# Altium PCB PCB_2_copi.PcbDoc
Units mil, origin at the board's own origin, x right, y up, seen from the top; angles counter-clockwise.
Board outline 6560 x 3345 mil, 2 copper layers (Top Layer, Bottom Layer); 164 components, 87 nets, 548 pads, 8 vias.
Unrouted connection lines stored in the file: 2.
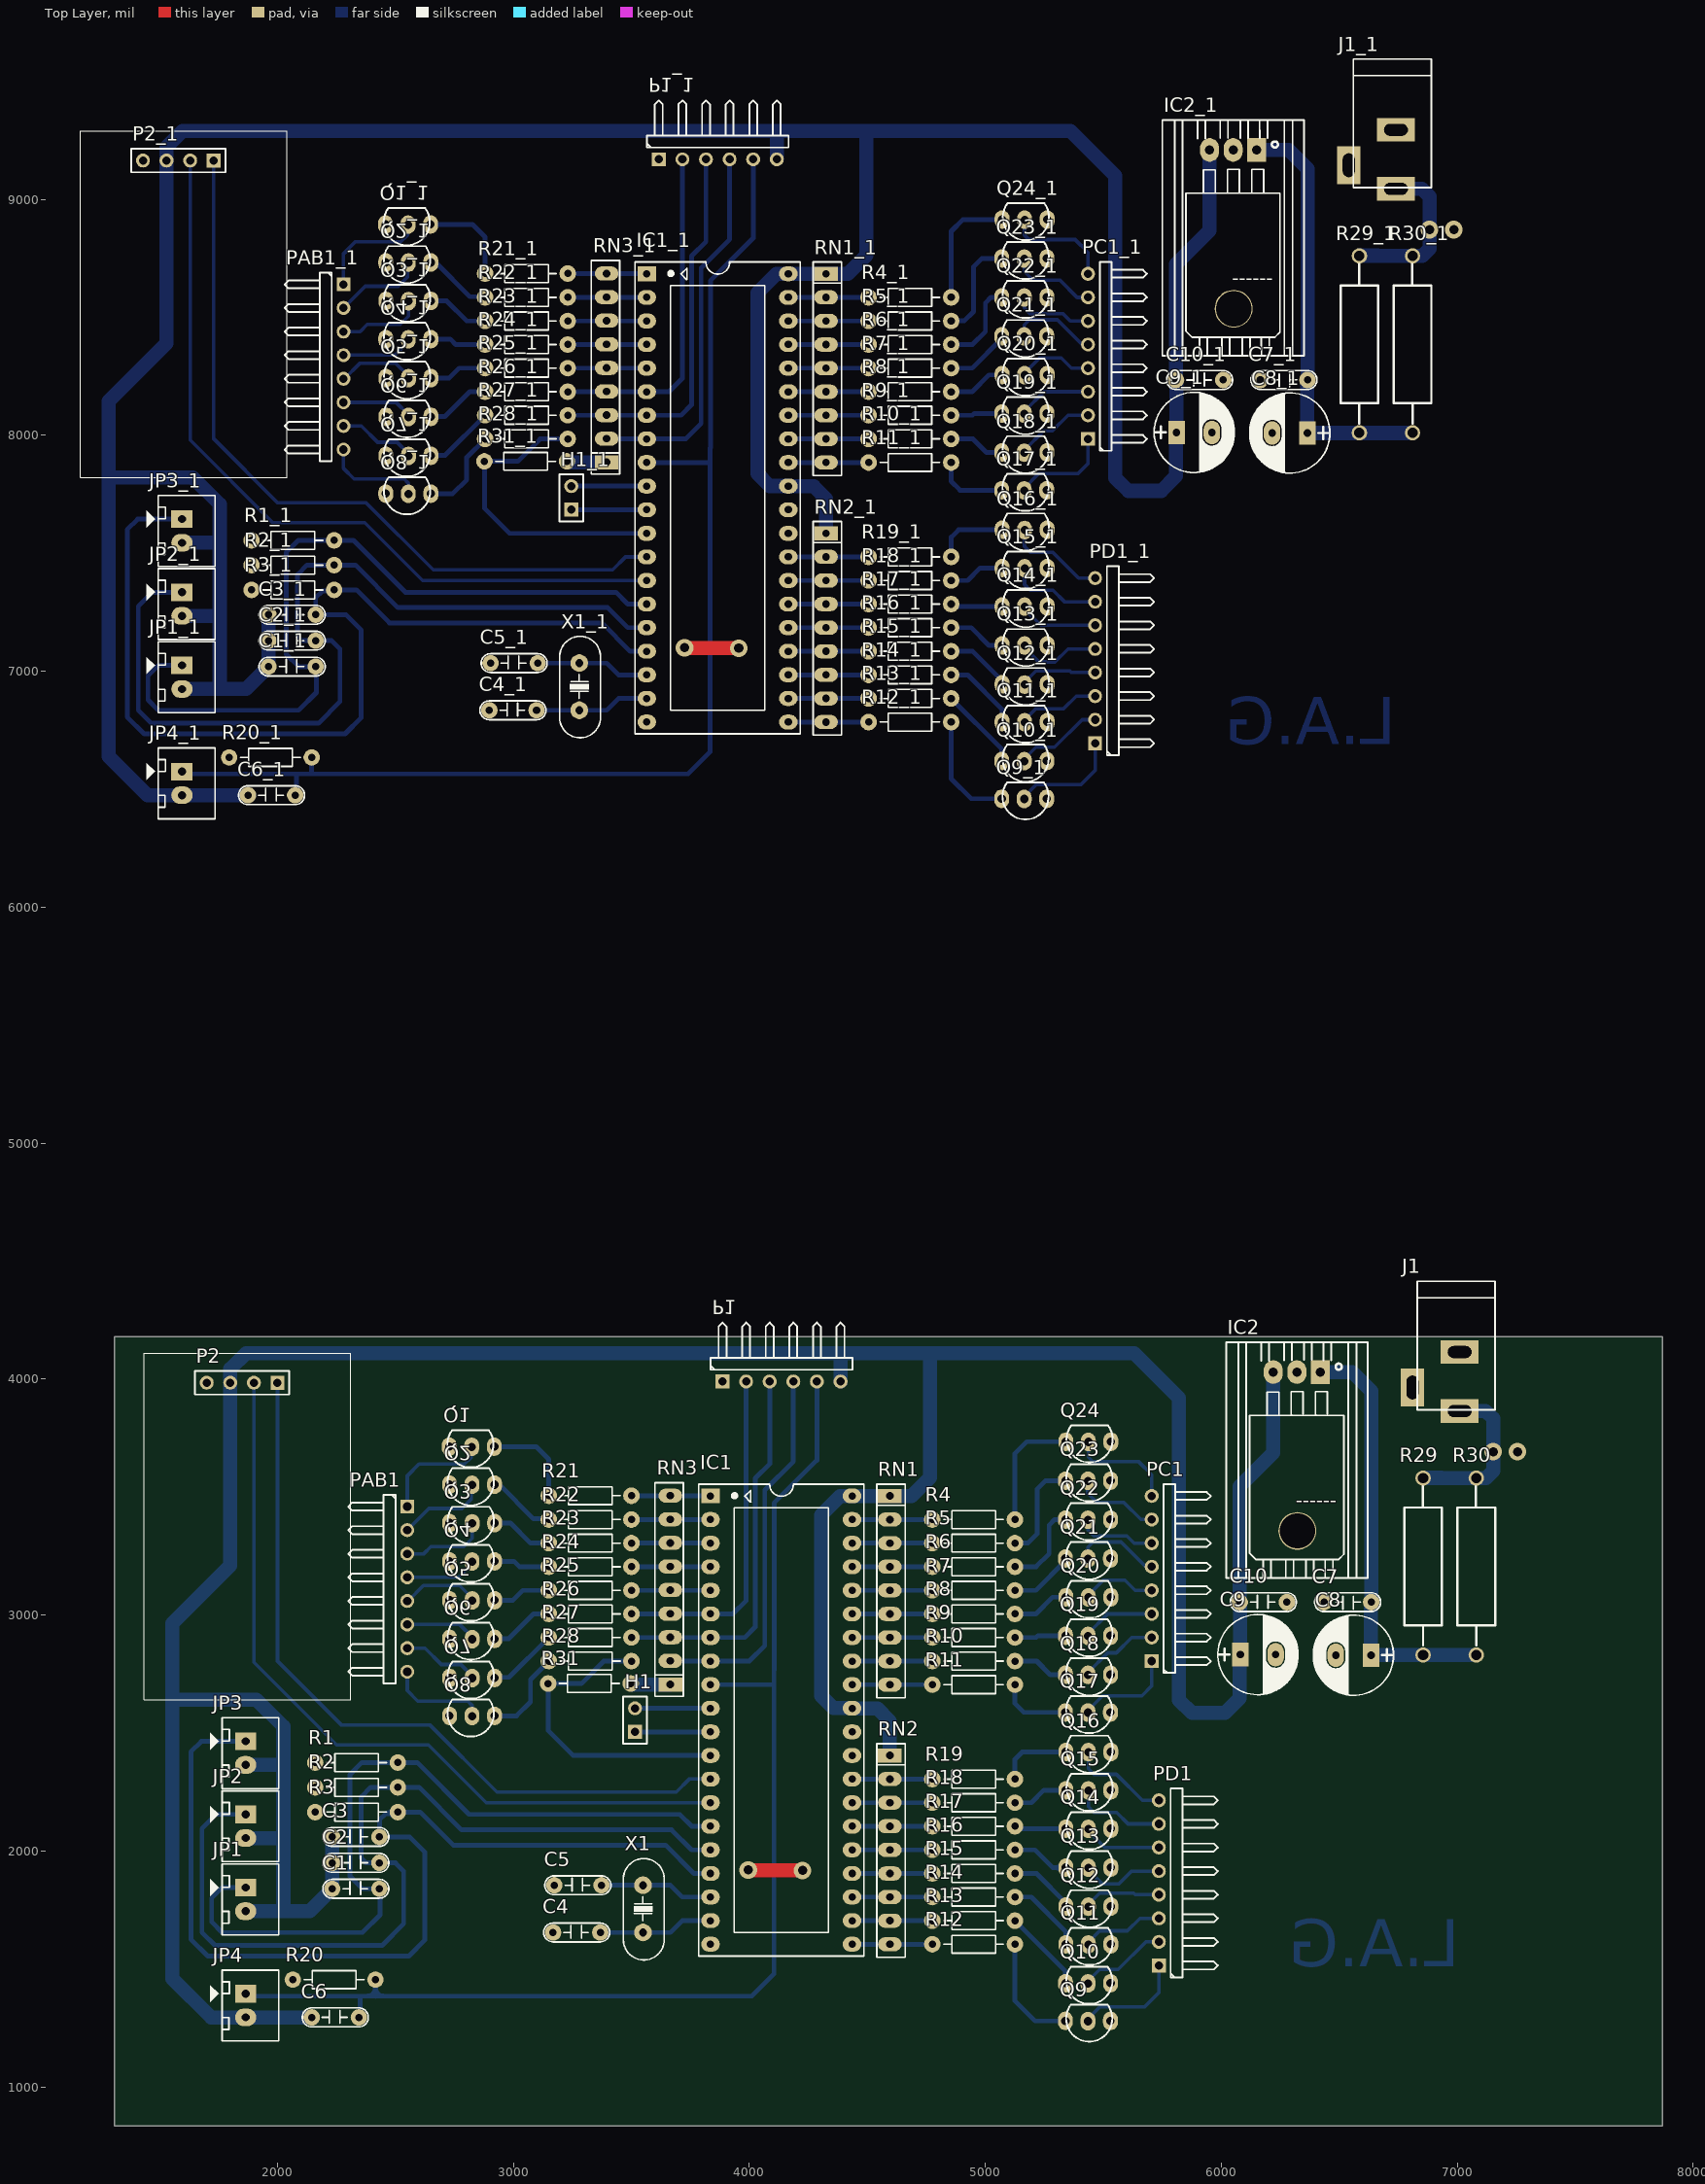
[diagram p0: Top Layer view]
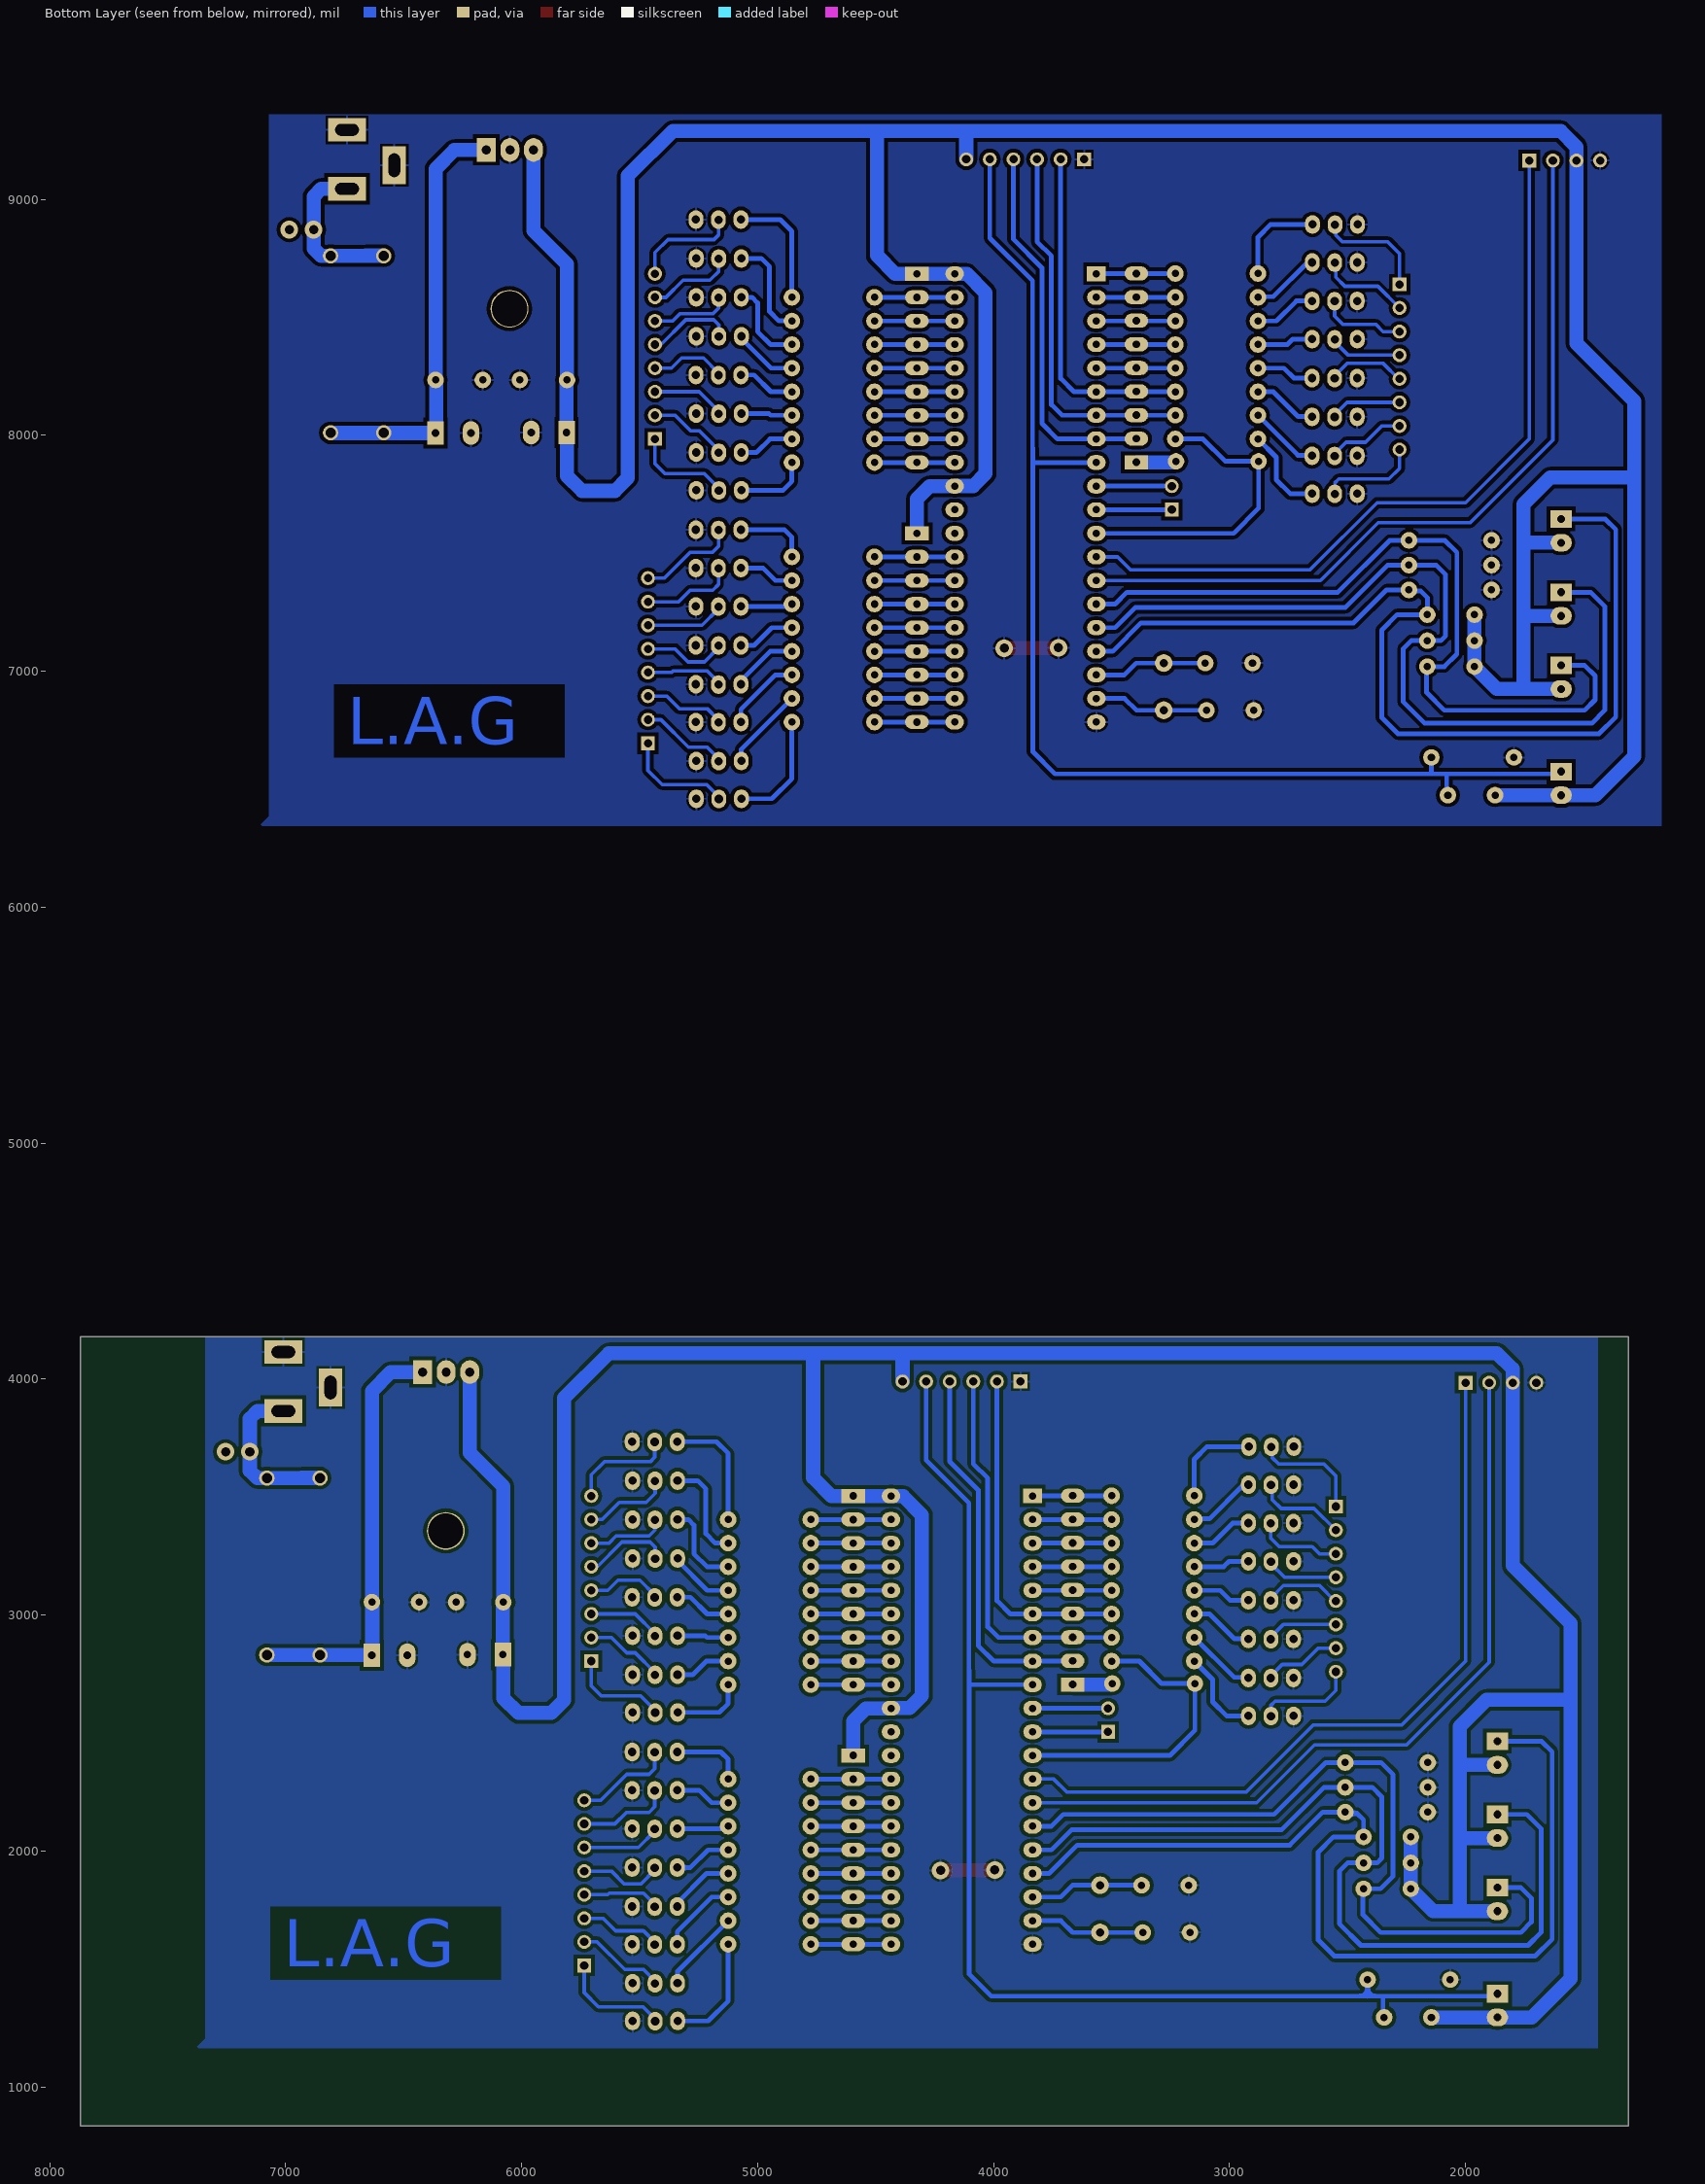
[diagram p1: Bottom Layer view, seen from below]

## Layer stack, top to bottom
Top Solder: solder mask 0.4, Solder Resist, Dk 3.5
Top Layer: signal copper 1.4
Dielectric 1: dielectric 12.6, FR-4, Dk 4.8
Bottom Layer: signal copper 1.4
Bottom Solder: solder mask 0.4, Solder Resist, Dk 3.5

## Board outline
1310,835 1310,4180 7870,4180 7870,835

## Design rules (kind name [scope] priority, off if disabled: settings)
Clearance [All] p1: gap=15 ignorepadtopadclearanceinfootprint=FALSE
PolygonConnect [All] p1: connectstyle=Relief reliefconductorwidth=10 reliefentries=4 polygonreliefangle="90 Angle" airgapwidth=10
RoutingVias [All] p1: holewidth=28 width=50 viastyle="Through Hole" minholewidth=28 minwidth=50 maxholewidth=28 maxwidth=50
SolderMaskExpansion [All] p1: expansion=4
Width [All] p1: maxlimit=60 minlimit=15 preferedwidth=20
30 further rules are at their usual default settings.

## Classes and differential pairs
component class Sche_Clock: C1 C2 C3 C4 C5 C6 C7 C8 C9 C10 H1 IC1 IC2 J1 JP1 JP2 JP3 JP4 P1 P2 PAB1 PC1 PD1 Q1 Q2 Q3 Q4 Q5 Q6 Q7 Q8 Q9 Q10 Q11 Q12 Q13 Q14 Q15 Q16 Q17 Q18 Q19 Q20 Q21 Q22 Q23 Q24 R1 R2 R3 R4 R5 R6 R7 R8 R9 R10 R11 R12 R13 R14 R15 R16 R17 R18 R19 R20 R21 R22 R23 R24 R25 R26 R27 R28 R29 R30 RN1 RN2 RN3 X1

## Components (designator, comment, footprint, x,y, rotation, side; value= is the part's Value field where it differs from the comment)
C1 "104" CN2 2332.06,1840 r0 top value=0.1uF
C1_1 "104" CN2 2062.06,7020 r0 top value=0.1uF (schematic designator C1)
C2 "104" CN2 2332.06,1950 r0 top value=0.1uF
C2_1 "104" CN2 2062.06,7130 r0 top value=0.1uF (schematic designator C2)
C3 "104" CN2 2332.06,2060 r0 top value=0.1uF
C3_1 "104" CN2 2062.06,7240 r0 top value=0.1uF (schematic designator C3)
C4 "22pF" CN2 3268,1655 r0 top value=0.1uF
C4_1 "22pF" CN2 2998,6835 r0 top value=0.1uF (schematic designator C4)
C5 "22pF" CN2 3273,1855 r0 top value=0.1uF
C5_1 "22pF" CN2 3003,7035 r0 top value=0.1uF (schematic designator C5)
C6 "104" CN2 2245,1295 r0 top value=0.1uF
C6_1 "104" CN2 1975,6475 r0 top value=0.1uF (schematic designator C6)
C7 "104" CN2 6535,3055 r180 top value=0.1uF
C7_1 "104" CN2 6265,8235 r180 top value=0.1uF (schematic designator C7)
C8 "100uF/35V" CP1.5/3.4 6635,2830 r180 top value=100uF/35V/50V
C8_1 "100uF/35V" CP1.5/3.4 6365,8010 r180 top value=100uF/35V/50V (schematic designator C8)
C9 "100uF/35V" CP1.5/3.4 6080,2832.5 r0 top value=100uF/35V/50V
C9_1 "100uF/35V" CP1.5/3.4 5810,8012.5 r0 top value=100uF/35V/50V (schematic designator C9)
C10 "104" CN2 6177.88,3054.8 r0 top value=0.1uF
C10_1 "104" CN2 5907.88,8234.8 r0 top value=0.1uF (schematic designator C10)
H1 "Header 2" HDR1X2 3515,2505 r90 top
H1_1 "Header 2" HDR1X2 3245,7685 r90 top (schematic designator H1)
IC1 "AT89S52" DIP40/W0.6 3835,3505 r270 top
IC1_1 "AT89S52" DIP40/W0.6 3565,8685 r270 top (schematic designator IC1)
IC2 "LM7805" QTO-220NH 6420,4030 r180 top
IC2_1 "LM7805" QTO-220NH 6150,9210 r180 top (schematic designator IC2)
J1 "JACK DC 5MM" "JACK DC 5MM" 7005,4213 r270 top
J1_1 "JACK DC 5MM" "JACK DC 5MM" 6735,9393 r270 top (schematic designator J1)
JP1 "JP2" CON2 1865,1845 r270 top value="Connector 2"
JP1_1 "JP2" CON2 1595,7025 r270 top value="Connector 2" (schematic designator JP1)
JP2 "JP2" CON2 1865,2155 r270 top value="Connector 2"
JP2_1 "JP2" CON2 1595,7335 r270 top value="Connector 2" (schematic designator JP2)
JP3 "JP2" CON2 1865,2465 r270 top value="Connector 2"
JP3_1 "JP2" CON2 1595,7645 r270 top value="Connector 2" (schematic designator JP3)
JP4 "JP2" CON2 1865,1395 r270 top value="Connector 2"
JP4_1 "JP2" CON2 1595,6575 r270 top value="Connector 2" (schematic designator JP4)
P1 "ISP" HDR1X6H 3886.05,3990 r0 top
P1_1 "ISP" HDR1X6H 3616.05,9170 r0 top (schematic designator P1)
P2 "Header 4" HDR1X4 2000,3985 r180 top
P2_1 "Header 4" HDR1X4 1730,9165 r180 top (schematic designator P2)
PAB1 "Header 8H" HDR1X8H 2550,3460 r270 top
PAB1_1 "Header 8H" HDR1X8H 2280,8640 r270 top (schematic designator PAB1)
PC1 "Header 8H" HDR1X8H 5705,2805 r90 top
PC1_1 "Header 8H" HDR1X8H 5435,7985 r90 top (schematic designator PC1)
PD1 "Header 8H" HDR1X8H 5735,1515 r90 top
PD1_1 "Header 8H" HDR1X8H 5465,6695 r90 top (schematic designator PD1)
Q1 "NPN" TRAN-LOWPOWER#1 2817.76,3718.94 r90 top
Q1_1 "NPN" TRAN-LOWPOWER#1 2547.76,8898.94 r90 top (schematic designator Q1)
Q2 "NPN" TRAN-LOWPOWER#1 2819.06,3558 r90 top
Q2_1 "NPN" TRAN-LOWPOWER#1 2549.06,8738 r90 top (schematic designator Q2)
Q3 "NPN" TRAN-LOWPOWER#1 2819.53,3395 r90 top
Q3_1 "NPN" TRAN-LOWPOWER#1 2549.53,8575 r90 top (schematic designator Q3)
Q4 "NPN" TRAN-LOWPOWER#1 2819.06,3233 r90 top
Q4_1 "NPN" TRAN-LOWPOWER#1 2549.06,8413 r90 top (schematic designator Q4)
Q5 "NPN" TRAN-LOWPOWER#1 2819.53,3068 r90 top
Q5_1 "NPN" TRAN-LOWPOWER#1 2549.53,8248 r90 top (schematic designator Q5)
Q6 "NPN" TRAN-LOWPOWER#1 2819.53,2903.94 r90 top
Q6_1 "NPN" TRAN-LOWPOWER#1 2549.53,8083.94 r90 top (schematic designator Q6)
Q7 "NPN" TRAN-LOWPOWER#1 2819.53,2738.94 r90 top
Q7_1 "NPN" TRAN-LOWPOWER#1 2549.53,7918.94 r90 top (schematic designator Q7)
Q8 "NPN" TRAN-LOWPOWER#1 2819.06,2578 r90 top
Q8_1 "NPN" TRAN-LOWPOWER#1 2549.06,7758 r90 top (schematic designator Q8)
Q9 "NPN" TRAN-LOWPOWER#2 5440,1285 r90 top
Q9_1 "NPN" TRAN-LOWPOWER#2 5170,6465 r90 top (schematic designator Q9)
Q10 "NPN" TRAN-LOWPOWER#2 5440.47,1445 r90 top
Q10_1 "NPN" TRAN-LOWPOWER#2 5170.47,6625 r90 top (schematic designator Q10)
Q11 "NPN" TRAN-LOWPOWER#2 5441.77,1610 r90 top
Q11_1 "NPN" TRAN-LOWPOWER#2 5171.77,6790 r90 top (schematic designator Q11)
Q12 "NPN" TRAN-LOWPOWER#2 5441.77,1770 r90 top
Q12_1 "NPN" TRAN-LOWPOWER#2 5171.77,6950 r90 top (schematic designator Q12)
Q13 "NPN" TRAN-LOWPOWER#2 5441.77,1935 r90 top
Q13_1 "NPN" TRAN-LOWPOWER#2 5171.77,7115 r90 top (schematic designator Q13)
Q14 "NPN" TRAN-LOWPOWER#2 5441.77,2100 r90 top
Q14_1 "NPN" TRAN-LOWPOWER#2 5171.77,7280 r90 top (schematic designator Q14)
Q15 "NPN" TRAN-LOWPOWER#2 5441.77,2262.8 r90 top
Q15_1 "NPN" TRAN-LOWPOWER#2 5171.77,7442.8 r90 top (schematic designator Q15)
Q16 "NPN" TRAN-LOWPOWER#2 5441.77,2425 r90 top
Q16_1 "NPN" TRAN-LOWPOWER#2 5171.77,7605 r90 top (schematic designator Q16)
Q17 "NPN" TRAN-LOWPOWER#2 5440,2592.58 r90 top
Q17_1 "NPN" TRAN-LOWPOWER#2 5170,7772.58 r90 top (schematic designator Q17)
Q18 "NPN" TRAN-LOWPOWER#2 5440.47,2752.58 r90 top
Q18_1 "NPN" TRAN-LOWPOWER#2 5170.47,7932.58 r90 top (schematic designator Q18)
Q19 "NPN" TRAN-LOWPOWER#2 5440.47,2917.58 r90 top
Q19_1 "NPN" TRAN-LOWPOWER#2 5170.47,8097.58 r90 top (schematic designator Q19)
Q20 "NPN" TRAN-LOWPOWER#2 5441.77,3080.94 r90 top
Q20_1 "NPN" TRAN-LOWPOWER#2 5171.77,8260.94 r90 top (schematic designator Q20)
Q21 "NPN" TRAN-LOWPOWER#2 5440,3245 r90 top
Q21_1 "NPN" TRAN-LOWPOWER#2 5170,8425 r90 top (schematic designator Q21)
Q22 "NPN" TRAN-LOWPOWER#2 5440.47,3410.08 r90 top
Q22_1 "NPN" TRAN-LOWPOWER#2 5170.47,8590.08 r90 top (schematic designator Q22)
Q23 "NPN" TRAN-LOWPOWER#2 5440.47,3575 r90 top
Q23_1 "NPN" TRAN-LOWPOWER#2 5170.47,8755 r90 top (schematic designator Q23)
Q24 "NPN" TRAN-LOWPOWER#2 5441.77,3740 r90 top
Q24_1 "NPN" TRAN-LOWPOWER#2 5171.77,8920 r90 top (schematic designator Q24)
R1 "1k" R1/4W 2160,2375 r0 top value="R1/4W - 1K"
R1_1 "1k" R1/4W 1890,7555 r0 top value="R1/4W - 1K" (schematic designator R1)
R2 "1k" R1/4W 2160,2270 r0 top value="R1/4W - 1K"
R2_1 "1k" R1/4W 1890,7450 r0 top value="R1/4W - 1K" (schematic designator R2)
R3 "1k" R1/4W 2160,2165 r0 top value="R1/4W - 1K"
R3_1 "1k" R1/4W 1890,7345 r0 top value="R1/4W - 1K" (schematic designator R3)
R4 "1k" R1/4W 4775,3405 r0 top value="R1/4W - 1K"
R4_1 "1k" R1/4W 4505,8585 r0 top value="R1/4W - 1K" (schematic designator R4)
R5 "1k" R1/4W 4775,3305 r0 top value="R1/4W - 1K"
R5_1 "1k" R1/4W 4505,8485 r0 top value="R1/4W - 1K" (schematic designator R5)
R6 "1k" R1/4W 4775,3205 r0 top value="R1/4W - 1K"
R6_1 "1k" R1/4W 4505,8385 r0 top value="R1/4W - 1K" (schematic designator R6)
R7 "1k" R1/4W 4775,3105 r0 top value="R1/4W - 1K"
R7_1 "1k" R1/4W 4505,8285 r0 top value="R1/4W - 1K" (schematic designator R7)
R8 "1k" R1/4W 4775,3005 r0 top value="R1/4W - 1K"
R8_1 "1k" R1/4W 4505,8185 r0 top value="R1/4W - 1K" (schematic designator R8)
R9 "1k" R1/4W 4775,2905 r0 top value="R1/4W - 1K"
R9_1 "1k" R1/4W 4505,8085 r0 top value="R1/4W - 1K" (schematic designator R9)
R10 "1k" R1/4W 4775,2805 r0 top value="R1/4W - 1K"
R10_1 "1k" R1/4W 4505,7985 r0 top value="R1/4W - 1K" (schematic designator R10)
R11 "1k" R1/4W 4775,2705 r0 top value="R1/4W - 1K"
R11_1 "1k" R1/4W 4505,7885 r0 top value="R1/4W - 1K" (schematic designator R11)
R12 "1k" R1/4W 4775,1605 r0 top value="R1/4W - 1K"
R12_1 "1k" R1/4W 4505,6785 r0 top value="R1/4W - 1K" (schematic designator R12)
R13 "1k" R1/4W 4775,1705 r0 top value="R1/4W - 1K"
R13_1 "1k" R1/4W 4505,6885 r0 top value="R1/4W - 1K" (schematic designator R13)
R14 "1k" R1/4W 4775,1805 r0 top value="R1/4W - 1K"
R14_1 "1k" R1/4W 4505,6985 r0 top value="R1/4W - 1K" (schematic designator R14)
R15 "1k" R1/4W 4775,1905 r0 top value="R1/4W - 1K"
R15_1 "1k" R1/4W 4505,7085 r0 top value="R1/4W - 1K" (schematic designator R15)
R16 "1k" R1/4W 4775,2005 r0 top value="R1/4W - 1K"
R16_1 "1k" R1/4W 4505,7185 r0 top value="R1/4W - 1K" (schematic designator R16)
R17 "1k" R1/4W 4775,2105 r0 top value="R1/4W - 1K"
R17_1 "1k" R1/4W 4505,7285 r0 top value="R1/4W - 1K" (schematic designator R17)
R18 "1k" R1/4W 4775,2205 r0 top value="R1/4W - 1K"
R18_1 "1k" R1/4W 4505,7385 r0 top value="R1/4W - 1K" (schematic designator R18)
R19 "1k" R1/4W 4775,2305 r0 top value="R1/4W - 1K"
R19_1 "1k" R1/4W 4505,7485 r0 top value="R1/4W - 1K" (schematic designator R19)
R20 "1k" R1/4W 2065,1455 r0 top value="R1/4W - 1K"
R20_1 "1k" R1/4W 1795,6635 r0 top value="R1/4W - 1K" (schematic designator R20)
R21 "1k" R1/4W 3150,3506 r0 top value="R1/4W - 1K"
R21_1 "1k" R1/4W 2880,8686 r0 top value="R1/4W - 1K" (schematic designator R21)
R22 "1k" R1/4W 3150,3405 r0 top value="R1/4W - 1K"
R22_1 "1k" R1/4W 2880,8585 r0 top value="R1/4W - 1K" (schematic designator R22)
R23 "1k" R1/4W 3150,3305 r0 top value="R1/4W - 1K"
R23_1 "1k" R1/4W 2880,8485 r0 top value="R1/4W - 1K" (schematic designator R23)
R24 "1k" R1/4W 3150,3205 r0 top value="R1/4W - 1K"
R24_1 "1k" R1/4W 2880,8385 r0 top value="R1/4W - 1K" (schematic designator R24)
R25 "1k" R1/4W 3150,3105 r0 top value="R1/4W - 1K"
R25_1 "1k" R1/4W 2880,8285 r0 top value="R1/4W - 1K" (schematic designator R25)
R26 "1k" R1/4W 3150,3005 r0 top value="R1/4W - 1K"
R26_1 "1k" R1/4W 2880,8185 r0 top value="R1/4W - 1K" (schematic designator R26)
R27 "1k" R1/4W 3150,2905.24 r0 top value="R1/4W - 1K"
R27_1 "1k" R1/4W 2880,8085.24 r0 top value="R1/4W - 1K" (schematic designator R27)
R28 "1k" R1/4W 3150,2805 r0 top value="R1/4W - 1K"
R28_1 "1k" R1/4W 2880,7985 r0 top value="R1/4W - 1K" (schematic designator R28)
R29 "33R" R2W 6855,3206 r270 top value="R2W - 47"
R29_1 "33R" R2W 6585,8386 r270 top value="R2W - 47" (schematic designator R29)
R30 "33R" R2W 7080,3205.99 r270 top value="R2W - 47"
R30_1 "33R" R2W 6810,8385.99 r270 top value="R2W - 47" (schematic designator R30)
R31 "10k" R1/4W 3497,2710 r180 top value="R1/4W - 1K"
R31_1 "10k" R1/4W 3227,7890 r180 top value="R1/4W - 1K" (schematic designator R31)
RN1 "10K" RN8 4595,3505 r270 top value="Tro thanh 10K"
RN1_1 "10K" RN8 4325,8685 r270 top value="Tro thanh 10K" (schematic designator RN1)
RN2 "10K" RN8 4595,2405 r270 top value="Tro thanh 10K"
RN2_1 "10K" RN8 4325,7585 r270 top value="Tro thanh 10K" (schematic designator RN2)
RN3 "10K" RN8 3665,2706 r90 top value="Tro thanh 10K"
RN3_1 "10K" RN8 3395,7886 r90 top value="Tro thanh 10K" (schematic designator RN3)
X1 "12Mhz" XT2 3549,1755 r270 top value=4Mhz
X1_1 "12Mhz" XT2 3279,6935 r270 top value=4Mhz (schematic designator X1)

## Footprints (in the part's own frame and the unit in brackets; to place one, negate y for a bottom-side part, rotate by r counter-clockwise, add the part's x,y. Pads: shape width x height; smd on the part's side, far side on the other; paste and mask are expansions set on the pad)
CN2 [mil]
  round 70 hole 31: 1(-100,0) 2(100,0)
  silkscreen extent -140,-40 140,40, body extent -154,-49 161,50, height 407
CON2 [mil] "CON2"
  rect 75x90 hole 34: 1(0,0)
  oval 75x90 hole 34: 2(100,0)
  silkscreen extent -100,-150 200,140, body extent -68,-70 168,107, height 236
CP1.5/3.4 [mil] "Tu hoa 220->470uF,16V, 470uF/16V,25V"
  rect 70x100 hole 32: 1(0,0)
  oval 70x100 hole 32: 2(150,0)
  silkscreen extent -95,-170 245,170, body extent -85,-157 230,157, height 446
DIP40/W0.6 [mm] "40 PIN, W 600mil, Pin to pin 100mil"
  rect 1.6x2 hole 0.787: 1(0,0)
  oval 1.6x2 hole 0.787: 2(2.54,0) 3(5.08,0) 4(7.62,0) 5(10.16,0) 6(12.7,0) 7(15.24,0) 8(17.78,0) 9(20.32,0) 10(22.86,0) 11(25.4,0) 12(27.94,0) 13(30.48,0) 14(33.02,0) 15(35.56,0) 16(38.1,0) 17(40.64,0) 18(43.18,0) 19(45.72,0) 20(48.26,0) 21(48.26,15.24) 22(45.72,15.24) 23(43.18,15.24) 24(40.64,15.24) 25(38.1,15.24) 26(35.56,15.24) 27(33.02,15.24) 28(30.48,15.24) 29(27.94,15.24) 30(25.4,15.24) 31(22.86,15.24) 32(20.32,15.24) 33(17.78,15.24) 34(15.24,15.24) 35(12.7,15.24) 36(10.16,15.24) 37(7.62,15.24) 38(5.08,15.24) 39(2.54,15.24) 40(0,15.24)
  silkscreen extent -1.28,-1.27 49.53,16.51, body extent -2.09,-0.25 50.35,15.24, height 5.7
HDR1X2 [mm] "Connector; Header; 2 Position"
  rect 1.5x1.5 hole 0.9: 1(0,0)
  round 1.5 hole 0.9: 2(2.54,0)
  silkscreen extent -1.27,-1.27 3.81,1.27
HDR1X4 [mm] "Connector; Header; 4 Position"
  rect 1.5x1.5 hole 0.9: 1(0,0)
  round 1.5 hole 0.9: 2(2.54,0) 3(5.08,0) 4(7.62,0)
  silkscreen extent -1.27,-1.27 8.89,1.27
HDR1X6H [mm] "Connector; Header; 6 Position; Right Angle"
  rect 1.5x1.5 hole 0.9: 1(0,0)
  round 1.5 hole 0.9: 2(2.54,0) 3(5.08,0) 4(7.62,0) 5(10.16,0) 6(12.7,0)
  silkscreen extent -1.27,1.27 13.97,6.35
HDR1X8H [mm] "Connector; Header; 8 Position; Right Angle"
  rect 1.5x1.5 hole 0.9: 1(0,0)
  round 1.5 hole 0.9: 2(2.54,0) 3(5.08,0) 4(7.62,0) 5(10.16,0) 6(12.7,0) 7(15.24,0) 8(17.78,0)
  silkscreen extent -1.27,-6.35 19.05,-1.27
"JACK DC 5MM" [mil]
  rect 100x160 hole 50 slot 100 at 90 deg: 1(348,5) 2(98,5)
  rect 160x100 hole 50 slot 100 at 0 deg: 3(248,-195)
  silkscreen extent -202,-175 343,155, body extent -187,-200 357,174, height 434
QTO-220NH [mil] "TO-220 - 1-2-3"
  rect 80x100 hole 39: 1(0,0)
  oval 80x100 hole 39: 2(100,0) 3(200,0)
  round 160 hole 150: H(98,673)
  silkscreen extent -200,-127 400,873, body extent -100,-4 300,764, height 165
R1/4W [mil] "R 1/4W, 2 Pin, 350mil"
  round 70 hole 31: 1(0,0) 2(350,0)
  silkscreen extent 48,-38 302,38, body extent -40,-47 386,47, height 111
R2W [mil] "dien tro 2W"
  round 65 hole 43.31: 1(-375,0) 2(375,0)
  silkscreen extent -340,-80 335,80, body extent -391,-110 391,110, height 307
RN8 [mil] "R SIP8, 9 Pin"
  rect 60x100 hole 32: 1(0,0)
  oval 60x100 hole 32: 2(100,0) 3(200,0) 4(300,0) 5(400,0) 6(500,0) 7(600,0) 8(700,0) 9(800,0)
  silkscreen extent -50,-55 855,65, body extent -43,-20 843,29, height 219
TRAN-LOWPOWER#1 [mm] "TO, Flat Index; 3 In-Line, Axial Leads; Body Dia. 4.5mm; Leads 0.51 x 0.48 mm (max)"
  oval 2x1.6 hole 0.9: 1(-0.127,2.286) 2(-0.151,-0.139) 3(-0.127,-2.564)
  silkscreen extent -2.35,-2.48 1.63,2.48, body extent -2.48,-3.01 1.52,2.79, height 11
TRAN-LOWPOWER#2 [mm] "TO, Flat Index; 3 In-Line, Axial Leads; Body Dia. 4.5mm; Leads 0.51 x 0.48 mm (max)"
  oval 2x1.6 hole 0.9: 1(-0.127,-2.286) 2(-0.151,0.139) 3(-0.127,2.564)
  silkscreen extent -2.35,-2.48 1.63,2.48, body extent -2.48,-2.79 1.52,3.01, height 11
XT2 [mil] "Footpin for Crystal 2 pin"
  round 75 hole 34: 1(-100,0) 2(100,0)
  silkscreen extent -213,-83 217,90, body extent -216,-87 216,90, height 144

## Part data
C1 C1_1 C2 C2_1 C3 C3_1 C4 C4_1 C5 C5_1 C6 C6_1 C7 C7_1 C10 C10_1: library part CN2, "Cap np 104 => 105pF"
C8 C8_1 C9 C9_1: library part CP3, "Cap 100uF/35V - 470uF/16V", Description 1="1000uF/6,3V - 470uF/16V - 330uF - 25V", Description 2="220uF/35V - 100uF/50V - 63V - 4,7uF/200V", Description 3="22uF => 33uF100V - 3,3uF => 4,7uF/250V", Description 4="2,2uF =>3,3uF/350 - 2,2uF/400V - 1uF/450V"
H1 H1_1: "Header, 2-Pin", LatestRevisionDate=17-Jul-2002, LatestRevisionNote="Re-released for DXP Platform.", Publisher="Altium Limited"
IC1 IC1_1: "AT89S52, 8k Byte Flash Memory , 40 Pin"
IC2 IC2_1: library part LM78xx, "On ap +, from + 5 to + 24VDC", =LM7808
JP1 JP1_1 JP2 JP2_1 JP3 JP3_1 JP4 JP4_1: library part Con2, "Connector 2"
P1 P1_1: library part "Header 6H", "Header, 6-Pin, Right Angle", LatestRevisionDate=17-Jul-2002, LatestRevisionNote="Re-released for DXP Platform.", Publisher="Altium Limited"
P2 P2_1: "Header, 4-Pin", LatestRevisionDate=17-Jul-2002, LatestRevisionNote="Re-released for DXP Platform.", Publisher="Altium Limited"
PAB1 PAB1_1 PC1 PC1_1 PD1 PD1_1: "Header, 8-Pin, Right Angle", LatestRevisionDate=17-Jul-2002, LatestRevisionNote="Re-released for DXP Platform.", Publisher="Altium Limited"
Q1 Q1_1 Q2 Q2_1 Q3 Q3_1 Q4 Q4_1 Q5 Q5_1 Q6 Q6_1 Q7 Q7_1 Q8 Q8_1 Q9 Q9_1 Q10 Q10_1 Q11 Q11_1 Q12 Q12_1 Q13 Q13_1 Q14 Q14_1 Q15 Q15_1 Q16 Q16_1 Q17 Q17_1 Q18 Q18_1 Q19 Q19_1 Q20 Q20_1 Q21 Q21_1 Q22 Q22_1 Q23 Q23_1 Q24 Q24_1: "NPN General", PackageDocument=Sep-1998, Code_JEDEC=TO-92A, ComponentLink1Description="Manufacturer Link", ComponentLink1URL=http://www.fairchildsemi.com/, ComponentLink2Description=Datasheet, ComponentLink2URL=http://www.fairchildsemi.com/ds/2N%2F2N3904.pdf, DatasheetDocument=1997, LatestRevisionDate=15-Jan-2003, LatestRevisionNote="PCB Footprint 'BCY-W3/D4.7' replaced", PackageReference=TO-92A, Published=8-Jun-2000, Publisher="Altium Limited"
R1 R1_1 R2 R2_1 R3 R3_1 R4 R4_1 R5 R5_1 R6 R6_1 R7 R7_1 R8 R8_1 R9 R9_1 R10 R10_1 R11 R11_1 R12 R12_1 R13 R13_1 R14 R14_1 R15 R15_1 R16 R16_1 R17 R17_1 R18 R18_1 R19 R19_1 R20 R20_1 R21 R21_1 R22 R22_1 R23 R23_1 R24 R24_1 R25 R25_1 R26 R26_1 R27 R27_1 R28 R28_1 R31 R31_1: library part R1/4W, "Resistor 1/4W"
R29 R29_1 R30 R30_1: library part R2W, "Resistor 2W"
RN1 RN1_1 RN2 RN2_1 RN3 RN3_1: library part RN8, "Resistor 8 (Thanh)"
X1 X1_1: library part XT2, "Crystal, 32.768 KHz, -40 to 85 degC, 3.2 x 1.5 x 0.9 mm SMD"

## Via types
v1: diameter 74.8, hole 39.37, Top Layer to Bottom Layer, 8 vias

## Nets (pads, with @x,y where several pads share a name; then routed paths per layer and width w, separated by ;. In a path a pad name is that pad's centre, name@x,y a point inside that pad or via, vN(x,y) a via of type N, cw(c..) or ccw(c..) an arc to the next point about the centre after c; other vN are vias at no path point)
+12: J1.1 R29.1 R30.1 | length 763.4
  Bottom Layer w60: 6931.81,3581.96 6855.96,3581.96 R29.1 R30.1 7120.99,3580.99 7152.17,3612.17 v1(7152.17,3692.17) 7152.17,3732.83 7152.17,3832.83 7120,3865 J1.1
A: Q8.3 R28.1 | length 381.7
  Bottom Layer w20: Q8.3 3013,2573 3072,2632 3072,2727 R28.1
B0: Q1.3 R21.1 | length 407.6
  Bottom Layer w20: Q1.3 3096.06,3713.94 3150,3660 R21.1
B1: Q2.3 R22.1 | length 291.3
  Bottom Layer w20: Q2.3 2940,3553 3085,3408 3147,3408 R22.1
B2: Q3.3 R23.1 | length 264.7
  Bottom Layer w20: Q3.3 2987,3390 3072,3305 R23.1
B3: Q4.3 R24.1 | length 239.5
  Bottom Layer w20: Q4.3 3002,3228 3025,3205 R24.1
B4: Q5.3 R25.1 | length 246.9
  Bottom Layer w20: Q5.3 2998,3063 3040,3105 R25.1
B5: Q6.3 R26.1 | length 273.5
  Bottom Layer w20: Q6.3 2921.53,2900 2980,2900 3085,3005 R26.1
B6: Q7.3 R27.1 | length 300.5
  Bottom Layer w20: Q7.3 2922.53,2736 2980.76,2736 R27.1
C0: Q24.3 R4.2 | length 516.5
  Bottom Layer w20: R4.2 5125,3685 5175,3735 Q24.3
C1: Q23.3 R5.2 | length 435.6
  Bottom Layer w20: R5.2 5125.24,3305.24 5180.24,3305.24 5220,3345 5220,3535 5255,3570 Q23.3
C2: Q22.3 R6.2 | length 368.5
  Bottom Layer w20: R6.2 5215,3205 5270,3260 5270,3381.33 5293.74,3405.08 Q22.3
C3: Q21.3 R7.2 | length 275.7
  Bottom Layer w20: R7.2 5213.89,3105 5339.06,3230.16 Q21.3
C4: Q20.3 R8.2 | length 245.2
  Bottom Layer w20: R8.2 5214.06,3005 5285,3075.94 Q20.3
C5: Q19.3 R9.2 | length 217.7
  Bottom Layer w20: R9.2 5215,2905 5222.58,2912.58 Q19.3
C6: Q18.3 R10.2 | length 238.3
  Bottom Layer w20: R10.2 5217.58,2805 5275,2747.58 Q18.3
C7: Q17.3 R11.2 | length 309.6
  Bottom Layer w20: R11.2 5125,2625 5162.42,2587.58 Q17.3
D0: Q9.3 R12.2 | length 489.3
  Bottom Layer w20: R12.2 5125,1365 5210,1280 Q9.3
D1: Q10.3 R13.2 | length 353.9
  Bottom Layer w20: R13.2 5339.53,1490.47 Q10.3
D2: Q11.3 R14.2 | length 330.4
  Bottom Layer w20: R14.2 5195,1805 5340.83,1659.17 Q11.3
D3: Q12.3 R15.2 | length 283.2
  Bottom Layer w20: R15.2 5216.87,1905 5340.83,1781.04 Q12.3
D4: Q13.3 R16.2 | length 246.9
  Bottom Layer w20: R16.2 5210,2005 5285,1930 Q13.3
D5: Q14.3 R17.2 | length 220
  Bottom Layer w20: R17.2 5135,2095 Q14.3
D6: Q15.3 R18.2 | length 237.7
  Bottom Layer w20: R18.2 5195,2205 5247.8,2257.8 Q15.3
D7: Q16.3 R19.2 | length 312.5
  Bottom Layer w20: R19.2 5125.24,2305.24 5125.24,2389 5156.24,2420 Q16.3
GND: C4.1 C5.1 C7.2 C8.2 C9.2 C10.2 IC1.20 IC2.2 J1.2 J1.3 P1.1 P2.4 Q1.1 Q2.1 Q3.1 Q4.1 Q5.1 Q6.1 Q7.1 Q8.1 Q9.1 Q10.1 Q11.1 Q12.1 Q13.1 Q14.1 Q15.1 Q16.1 Q17.1 Q18.1 Q19.1 Q20.1 Q21.1 Q22.1 Q23.1 Q24.1 R1.1 R2.1 R3.1 R20.1 | length 230.8
  Top Layer w60: v1(3995,1920) 3995.97,1919.03 4224.03,1919.03 v1(4225,1918.05)
MISO: IC1.7 P1.3 R27.2 RN3.3 | length 1609
  Bottom Layer w20: R27.2 3500.12,2905.12 3650,2905.12 3834.88,2905.12 IC1.7 3980,2905 4025,2950 4025,3580 4086.05,3641.05 P1.3
MOSI: IC1.6 P1.2 R26.2 RN3.4 | length 1438.2
  Bottom Layer w20: R26.2 3650,3005 IC1.6 3930,3005 3986.05,3061.05 P1.2
NetC7_1: C7.1 C8.1 IC2.1 R29.2 R30.2 | length 1785.8
  Bottom Layer w60: IC2.1 6555,4030 6635,3950 C7.1 6633.09,3053.09 C8.1@6633.09,2858.09 ; C8.1 R30.2@7080,2830
NetH1_1: H1.1 IC1.11 | length 320
  Bottom Layer w20: H1.1 IC1.11
NetH1_2: H1.2 IC1.10 | length 320
  Bottom Layer w20: H1.2 IC1.10
NetIC1_1: IC1.1 R21.2 RN3.9 | length 335.4
  Bottom Layer w20: R21.2 3650,3506 3834,3506 IC1.1
NetIC1_2: IC1.2 R22.2 RN3.8 | length 335
  Bottom Layer w20: R22.2 3650,3405 IC1.2
NetIC1_3: IC1.3 R23.2 RN3.7 | length 335
  Bottom Layer w20: R23.2 3650,3305 IC1.3
NetIC1_4: IC1.4 R24.2 RN3.6 | length 335
  Bottom Layer w20: R24.2 3650,3205 IC1.4
NetIC1_5: IC1.5 R25.2 RN3.5 | length 334.9
  Bottom Layer w20: R25.2@3500.12,3105 3650,3105 IC1.5
NetIC1_12: IC1.12 R28.2 R31.2 | length 1323.3
  Bottom Layer w20: R28.2 3383,2805 3288,2710 R31.2 3147,2511 3253,2405 IC1.12
NetIC1_21: IC1.21 R12.1 RN2.9 | length 340
  Bottom Layer w20: IC1.21 R12.1
NetIC1_22: IC1.22 R13.1 RN2.8 | length 340
  Bottom Layer w20: IC1.22 R13.1
NetIC1_23: IC1.23 R14.1 RN2.7 | length 340
  Bottom Layer w20: IC1.23 R14.1
NetIC1_24: IC1.24 R15.1 RN2.6 | length 340
  Bottom Layer w20: IC1.24 R15.1
NetIC1_25: IC1.25 R16.1 RN2.5 | length 340
  Bottom Layer w20: IC1.25 R16.1
NetIC1_26: IC1.26 R17.1 RN2.4 | length 340
  Bottom Layer w20: IC1.26 R17.1
NetIC1_27: IC1.27 R18.1 RN2.3 | length 340
  Bottom Layer w20: IC1.27 R18.1
NetIC1_28: IC1.28 R19.1 RN2.2 | length 340
  Bottom Layer w20: IC1.28 R19.1
NetIC1_32: IC1.32 R11.1 RN1.9 | length 340
  Bottom Layer w20: IC1.32 4620,2705 R11.1
NetIC1_33: IC1.33 R10.1 RN1.8 | length 340
  Bottom Layer w20: IC1.33 4620,2805 R10.1
NetIC1_34: IC1.34 R9.1 RN1.7 | length 340
  Bottom Layer w20: IC1.34 4620,2905 R9.1
NetIC1_35: IC1.35 R8.1 RN1.6 | length 340
  Bottom Layer w20: IC1.35 4620,3005 R8.1
NetIC1_36: IC1.36 R7.1 RN1.5 | length 340
  Bottom Layer w20: IC1.36 4615,3105 R7.1
NetIC1_37: IC1.37 R6.1 RN1.4 | length 340
  Bottom Layer w20: IC1.37 4620,3205 R6.1
NetIC1_38: IC1.38 R5.1 RN1.3 | length 340
  Bottom Layer w20: IC1.38 4620,3305 R5.1
NetIC1_39: IC1.39 R4.1 RN1.2 | length 340
  Bottom Layer w20: IC1.39 4620,3405 R4.1
NetPAB1_1: PAB1.1 Q1.2 | length 478.7
  Bottom Layer w15: PAB1.1 2550,3590 2600,3640 2792.06,3640 2820.19,3668.13 2820.19,3709.96 Q1.2
NetPAB1_2: PAB1.2 Q2.2 | length 387.8
  Bottom Layer w15: PAB1.2 2641.87,3451.87 2781.87,3451.87 2820.19,3490.19 2820.19,3547.72 Q2.2
NetPAB1_3: PAB1.3 Q3.2 | length 366
  Bottom Layer w15: PAB1.3 2620,3260 2650,3290 2790,3290 2825,3325 Q3.2
NetPAB1_4: PAB1.4 Q4.2 | length 308.1
  Bottom Layer w15: PAB1.4 2767.31,3160 2824.53,3217.22 Q4.2
NetPAB1_5: PAB1.5 Q5.2 | length 333.8
  Bottom Layer w15: PAB1.5 2553.58,3060 2618.58,3125 2771.9,3125 2825,3071.9 Q5.2
NetPAB1_6: PAB1.6 Q6.2 | length 306.4
  Bottom Layer w15: PAB1.6 2772.84,2960 2825,2907.84 Q6.2
NetPAB1_7: PAB1.7 Q7.2 | length 333.4
  Bottom Layer w15: PAB1.7 2625,2860 2694.19,2790.81 2777.03,2790.81 2825,2742.84 Q7.2
NetPAB1_8: PAB1.8 Q8.2 | length 425.9
  Bottom Layer w15: PAB1.8 2550,2680 2595,2635 2807.05,2635 2824.53,2617.53 Q8.2
NetPC1_1: PC1.1 Q17.2 | length 428.2
  Bottom Layer w15: Q17.2 5434.53,2596.48 5496.05,2658 5663,2658 5705,2700 PC1.1
NetPC1_2: PC1.2 Q18.2 | length 341.4
  Bottom Layer w15: Q18.2 5435,2756.48 5518.52,2840 5555,2840 5620,2905 PC1.2
NetPC1_3: PC1.3 Q19.2 | length 314.4
  Bottom Layer w15: Q19.2 5435,2921.48 5518.52,3005 PC1.3
NetPC1_4: PC1.4 Q20.2 | length 322.8
  Bottom Layer w15: Q20.2 5436.3,3084.84 5499.84,3148.38 5591.62,3148.38 5635,3105 PC1.4
NetPC1_5: PC1.5 Q21.2 | length 376.5
  Bottom Layer w15: Q21.2 5434.53,3288.58 5455.94,3310 5575,3310 5685,3200 5700,3200 PC1.5
NetPC1_6: PC1.6 Q22.2 | length 336.9
  Bottom Layer w15: Q22.2 5435,3360 5460,3335 5599.97,3335 5629.97,3305 PC1.6
NetPC1_7: PC1.7 Q23.2 | length 369.6
  Bottom Layer w15: Q23.2 5435,3515 5472.48,3477.52 5586.38,3477.52 5658.89,3405 PC1.7
NetPC1_8: PC1.8 Q24.2 | length 454.6
  Bottom Layer w15: Q24.2 5436.3,3668.7 5455,3650 5650,3650 5705,3595 PC1.8
NetPD1_1: PD1.1 Q9.2 | length 471.3
  Bottom Layer w15: Q9.2 5434.53,1288.9 5485.62,1340 5675,1340 5735,1400 PD1.1
NetPD1_2: PD1.2 Q10.2 | length 378.6
  Bottom Layer w15: Q10.2 5435,1448.9 5484.04,1497.94 5562.94,1497.94 5680,1615 PD1.2
NetPD1_3: PD1.3 Q11.2 | length 350.4
  Bottom Layer w15: Q11.2 5436.3,1613.9 5484.27,1661.87 5601.87,1661.87 5655,1715 PD1.3
NetPD1_4: PD1.4 Q12.2 | length 331.3
  Bottom Layer w15: Q12.2 5436.3,1773.9 5484.27,1821.87 5628.13,1821.87 5635,1815 PD1.4
NetPD1_5: PD1.5 Q13.2 | length 355.9
  Bottom Layer w15: Q13.2 5436.3,1919.22 5495.52,1860 5565,1860 5620,1915 PD1.5
NetPD1_6: PD1.6 Q14.2 | length 337.2
  Bottom Layer w15: Q14.2 5436.3,2084.22 5505.52,2015 PD1.6
NetPD1_7: PD1.7 Q15.2 | length 397.9
  Bottom Layer w15: Q15.2 5436.3,2187.76 5460,2164.05 5555.94,2164.05 5605,2115 PD1.7
NetPD1_8: PD1.8 Q16.2 | length 424.4
  Bottom Layer w15: Q16.2 5436.3,2348.7 5460,2325 5555,2325 5665,2215 PD1.8
RST: C6.2 IC1.9 JP4.1 P1.5 R20.2 | length 5299.6
  Bottom Layer w20: JP4.1 1875,1385 2345,1385 ; C6.2@2350,1295 2350,1380 2345,1385 ; R20.2 2415,1385 ; IC1.9 4104.07,2705 ; P1.5 4286.05,3656.05 4105,3475 4105,2767.49 4104.07,2766.56 4104.07,2705 ; 2345,1385 2415,1385 ; 2415,1385 4010,1385 4104.07,1479.07 4104.07,2705
SCK: IC1.8 P1.4 RN3.2 | length 1612.2
  Bottom Layer w20: RN3.2@3650,2805.24 3650.12,2805.12 3834.88,2805.12 IC1.8 4000,2805 4065,2870 4065,3530 4186.05,3651.05 P1.4
SCL: IC1.13 P2.1 | length 3267.7
  Bottom Layer w15: P2.1 2000,2805 2270,2535 2645,2535 2930,2250 3690,2250 3745,2305 IC1.13
SDA: IC1.14 P2.2 | length 3366.5
  Bottom Layer w15: P2.2 1900,2800 2250,2450 2640,2450 2885,2205 IC1.14
SW1: C1.2 IC1.15 JP1.1 R1.2 | length 3372.5
  Bottom Layer w20: JP1.1@1860,1845 1765,1845 1721,1801 1721,1699.25 1765.25,1655 2360,1655 2435,1730 2435,1837.06 C1.2 2360,1840 2307.06,1892.94 2307.06,2324.06 2358,2375 R1.2 2591.86,2375 2811.86,2155 3705,2155 3755,2105 IC1.15
SW2: C2.2 IC1.16 JP2.1 R2.2 | length 3858
  Bottom Layer w20: JP2.1 1740,2155 1680,2095 1680,1655.11 1735,1600.11 2443.55,1600.11 2535,1691.56 2535,1915 2500,1950 C2.2 2375,1950 2355,1970 2355,2230 2395,2270 R2.2 2600,2270 2780,2090 3670,2090 3755,2005 IC1.16
SW3: C3.2 IC1.17 JP3.1 R3.2 | length 4276.6
  Bottom Layer w20: JP3.1@1860,2465 1677.54,2465 1633.28,2420.75 1633.28,1626.72 1705,1555 2556.62,1555 2625,1623.38 2625,1995 2560,2060 C3.2 2432.06,2132.06 2460,2160 2505,2160 R3.2 2604.6,2165 2744.6,2025 3645,2025 3765,1905 IC1.17
VCC: C1.1 C2.1 C3.1 C6.1 C9.1 C10.1 IC1.31 IC1.40 IC2.3 JP1.2 JP2.2 JP3.2 JP4.2 P1.6 P2.3 R31.1 RN1.1 RN2.1 RN3.1 | length 15308.9
  Bottom Layer w20: RN3.1@3644.76,2700 RN3.1@3650,2705.24
  Bottom Layer w60: JP1.2 2025,1745 ; JP2.2 2020,2055 2025,2060 ; JP3.2 2025,2365 ; C6.1@2150,1295 C6.1 JP4.2 1720,1295 1555,1460 1555,2641.46 ; C3.1 C2.1 C1.1 2137.06,1745 2025,1745 ; R31.1@3503,2706 RN3.1 ; P1.6 4386.05,4108.95 4385,4110 ; RN2.1 4595,2551.48 4542.05,2604.43 4435.57,2604.43 IC1.31 4434.43,2605.57 4355.71,2605.57 4304.07,2657.22 4304.07,3424.68 4383.81,3504.43 4434.43,3504.43 IC1.40 RN1.1 4687.94,3505 4765,3582.06 4765,4110 ; C9.1@6077.88,2797.88 6077.88,2647.88 6015,2585 5875,2585 5820,2640 5820,3920 5630,4110 4765,4110 ; C9.1@6079.8,2832.5 6079.8,3052.89 C10.1 6077.88,3545.88 6220,3688 IC2.3 ; 1555,2641.46 1555,2965 1800,3210 P2.3 1800,4042.91 1867.09,4110 4385,4110 ; 1555,2641.46 1911.07,2641.46 2025,2527.53 2025,2365 ; 2025,1745 2025,2060 ; 2025,2060 2025,2365 ; 4385,4110 4765,4110
XTLA1: C5.2 IC1.18 X1.1 | length 482.7
  Bottom Layer w20: C5.2 X1.1 3665.6,1855 3715.6,1805 IC1.18
XTLA2: C4.2 IC1.19 X1.2 | length 487.7
  Bottom Layer w20: C4.2 X1.2 3665,1655 3715,1705 IC1.19
pads on no net: C1_1.1 C1_1.2 C2_1.1 C2_1.2 C3_1.1 C3_1.2 C4_1.1 C4_1.2 C5_1.1 C5_1.2 C6_1.1 C6_1.2 C7_1.1 C7_1.2 C8_1.1 C8_1.2 C9_1.1 C9_1.2 C10_1.1 C10_1.2 H1_1.1 H1_1.2 IC1.29 IC1.30 IC1_1.1 IC1_1.2 IC1_1.3 IC1_1.4 IC1_1.5 IC1_1.6 IC1_1.7 IC1_1.8 IC1_1.9 IC1_1.10 IC1_1.11 IC1_1.12 IC1_1.13 IC1_1.14 IC1_1.15 IC1_1.16 IC1_1.17 IC1_1.18 IC1_1.19 IC1_1.20 IC1_1.21 IC1_1.22 IC1_1.23 IC1_1.24 IC1_1.25 IC1_1.26 IC1_1.27 IC1_1.28 IC1_1.29 IC1_1.30 IC1_1.31 IC1_1.32 IC1_1.33 IC1_1.34 IC1_1.35 IC1_1.36 IC1_1.37 IC1_1.38 IC1_1.39 IC1_1.40 IC2.H IC2_1.1 IC2_1.2 IC2_1.3 IC2_1.H J1_1.1 J1_1.2 J1_1.3 JP1_1.1 JP1_1.2 JP2_1.1 JP2_1.2 JP3_1.1 JP3_1.2 JP4_1.1 JP4_1.2 P1_1.1 P1_1.2 P1_1.3 P1_1.4 P1_1.5 P1_1.6 P2_1.1 P2_1.2 P2_1.3 P2_1.4 PAB1_1.1 PAB1_1.2 PAB1_1.3 PAB1_1.4 PAB1_1.5 PAB1_1.6 PAB1_1.7 PAB1_1.8 PC1_1.1 PC1_1.2 PC1_1.3 PC1_1.4 PC1_1.5 PC1_1.6 PC1_1.7 PC1_1.8 PD1_1.1 PD1_1.2 PD1_1.3 PD1_1.4 PD1_1.5 PD1_1.6 PD1_1.7 PD1_1.8 Q1_1.1 Q1_1.2 Q1_1.3 Q2_1.1 Q2_1.2 Q2_1.3 Q3_1.1 Q3_1.2 Q3_1.3 Q4_1.1 Q4_1.2 Q4_1.3 Q5_1.1 Q5_1.2 Q5_1.3 Q6_1.1 Q6_1.2 Q6_1.3 Q7_1.1 Q7_1.2 Q7_1.3 Q8_1.1 Q8_1.2 Q8_1.3 Q9_1.1 Q9_1.2 Q9_1.3 Q10_1.1 Q10_1.2 Q10_1.3 Q11_1.1 Q11_1.2 Q11_1.3 Q12_1.1 Q12_1.2 Q12_1.3 Q13_1.1 Q13_1.2 Q13_1.3 Q14_1.1 Q14_1.2 Q14_1.3 Q15_1.1 Q15_1.2 Q15_1.3 Q16_1.1 Q16_1.2 Q16_1.3 Q17_1.1 Q17_1.2 Q17_1.3 Q18_1.1 Q18_1.2 Q18_1.3 Q19_1.1 Q19_1.2 Q19_1.3 Q20_1.1 Q20_1.2 Q20_1.3 Q21_1.1 Q21_1.2 Q21_1.3 Q22_1.1 Q22_1.2 Q22_1.3 Q23_1.1 Q23_1.2 Q23_1.3 Q24_1.1 Q24_1.2 Q24_1.3 R1_1.1 R1_1.2 R2_1.1 R2_1.2 R3_1.1 R3_1.2 R4_1.1 R4_1.2 R5_1.1 R5_1.2 R6_1.1 R6_1.2 R7_1.1 R7_1.2 R8_1.1 R8_1.2 R9_1.1 R9_1.2 R10_1.1 R10_1.2 R11_1.1 R11_1.2 R12_1.1 R12_1.2 R13_1.1 R13_1.2 R14_1.1 R14_1.2 R15_1.1 R15_1.2 R16_1.1 R16_1.2 R17_1.1 R17_1.2 R18_1.1 R18_1.2 R19_1.1 R19_1.2 R20_1.1 R20_1.2 R21_1.1 R21_1.2 R22_1.1 R22_1.2 R23_1.1 R23_1.2 R24_1.1 R24_1.2 R25_1.1 R25_1.2 R26_1.1 R26_1.2 R27_1.1 R27_1.2 R28_1.1 R28_1.2 R29_1.1 R29_1.2 R30_1.1 R30_1.2 R31_1.1 R31_1.2 RN1_1.1 RN1_1.2 RN1_1.3 RN1_1.4 RN1_1.5 RN1_1.6 RN1_1.7 RN1_1.8 RN1_1.9 RN2_1.1 RN2_1.2 RN2_1.3 RN2_1.4 RN2_1.5 RN2_1.6 RN2_1.7 RN2_1.8 RN2_1.9 RN3_1.1 RN3_1.2 RN3_1.3 RN3_1.4 RN3_1.5 RN3_1.6 RN3_1.7 RN3_1.8 RN3_1.9 X1_1.1 X1_1.2
copper on no net: | length 72656.5
  Top Layer w60: v1(3725,7100) 3725.97,7099.03 3954.03,7099.03 v1(3955,7098.05)
  Bottom Layer w15: 1630,9165 1630,7980 1980,7630 2370,7630 2615,7385 3565,7385 ; 1730,9165 1730,7985 2000,7715 2375,7715 2660,7430 3420,7430 3475,7485 3565,7485 ; 2280,7940 2280,7860 2325,7815 2537.05,7815 2554.53,7797.53 2554.53,7752.06 ; 2280,8040 2355,8040 2424.19,7970.81 2507.03,7970.81 2555,7922.84 2555,7913 ; 2280,8140 2502.84,8140 2555,8087.84 2555,8078 ; 2280,8240 2283.58,8240 2348.58,8305 2501.9,8305 2555,8251.9 2555,8242.06 ; 2280,8340 2497.31,8340 2554.53,8397.22 2554.53,8407.06 ; 2280,8440 2350,8440 2380,8470 2520,8470 2555,8505 2555,8569.06 ; 2280,8540 2371.87,8631.87 2511.87,8631.87 2550.19,8670.19 2550.19,8727.72 2554.53,8732.06 ; 2280,8640 2280,8770 2330,8820 2522.06,8820 2550.19,8848.13 2550.19,8889.96 2553.23,8893 ; 5164.53,6459.06 5164.53,6468.9 5215.62,6520 5405,6520 5465,6580 5465,6695 ; 5164.53,7766.64 5164.53,7776.48 5226.05,7838 5393,7838 5435,7880 5435,7985 ; 5164.53,8419.06 5164.53,8468.58 5185.94,8490 5305,8490 5415,8380 5430,8380 5435,8385 ; 5165,6619.06 5165,6628.9 5214.04,6677.94 5292.94,6677.94 5410,6795 5465,6795 ; 5165,7926.64 5165,7936.48 5248.52,8020 5285,8020 5350,8085 5435,8085 ; 5165,8091.64 5165,8101.48 5248.52,8185 5435,8185 ; 5165,8584.14 5165,8540 5190,8515 5329.97,8515 5359.97,8485 5435,8485 ; 5165,8749.06 5165,8695 5202.48,8657.52 5316.38,8657.52 5388.89,8585 5435,8585 ; 5166.3,6784.06 5166.3,6793.9 5214.27,6841.87 5331.87,6841.87 5385,6895 5465,6895 ; 5166.3,6944.06 5166.3,6953.9 5214.27,7001.87 5358.13,7001.87 5365,6995 5465,6995 ; 5166.3,7109.06 5166.3,7099.22 5225.52,7040 5295,7040 5350,7095 5465,7095 ; 5166.3,7274.06 5166.3,7264.22 5235.52,7195 5465,7195 ; 5166.3,7436.86 5166.3,7367.76 5190,7344.06 5285.94,7344.06 5335,7295 5465,7295 ; 5166.3,7599.06 5166.3,7528.7 5190,7505 5285,7505 5395,7395 5465,7395 ; 5166.3,8255 5166.3,8264.84 5229.84,8328.38 5321.62,8328.38 5365,8285 5435,8285 ; 5166.3,8914.06 5166.3,8848.7 5185,8830 5380,8830 5435,8775 5435,8685
  Bottom Layer w20: 1590,7025 1495,7025 1451,6981 1451,6879.25 1495.25,6835 2090,6835 2165,6910 2165,7017.06 2162.06,7020 2090,7020 2037.06,7072.94 2037.06,7504.06 2088,7555 2240,7555 2321.86,7555 2541.86,7335 3435,7335 3485,7285 3565,7285 ; 1590,7645 1407.54,7645 1363.28,7600.75 1363.28,6806.72 1435,6735 2286.62,6735 2355,6803.38 2355,7175 2290,7240 2162.06,7240 2162.06,7312.06 2190,7340 2235,7340 2240,7345 2334.6,7345 2474.6,7205 3375,7205 3495,7085 3565,7085 ; 1595,6575 1605,6565 2075,6565 ; 1595,7335 1470,7335 1410,7275 1410,6835.11 1465,6780.11 2173.55,6780.11 2265,6871.56 2265,7095 2230,7130 2162.06,7130 2105,7130 2085,7150 2085,7410 2125,7450 2240,7450 2330,7450 2510,7270 3400,7270 3485,7185 3565,7185 ; 2080,6475 2080,6560 2075,6565 ; 2145,6635 2145,6565 ; 2648.7,8893.94 2826.06,8893.94 2880,8840 2880,8686 ; 2650,7753 2743,7753 2802,7812 2802,7907 2880,7985 ; 2650,8408 2732,8408 2755,8385 2880,8385 ; 2650,8733 2670,8733 2815,8588 2877,8588 2880,8585 ; 2650.47,7913.94 2652.53,7916 2710.76,7916 2880,8085.24 ; 2650.47,8078.94 2651.53,8080 2710,8080 2815,8185 2880,8185 ; 2650.47,8243 2728,8243 2770,8285 2880,8285 ; 2650.47,8570 2717,8570 2802,8485 2880,8485 ; 3098,6835 3279,6835 3395,6835 3445,6885 3565,6885 ; 3103,7035 3279,7035 3395.6,7035 3445.6,6985 3565,6985 ; 3230,7985 3113,7985 3018,7890 2877,7890 2877,7691 2983,7585 3565,7585 ; 3230,8085.24 3230.12,8085.12 3380,8085.12 3564.88,8085.12 3565,8085 3710,8085 3755,8130 3755,8760 3816.05,8821.05 3816.05,9170 ; 3230,8185 3380,8185 3565,8185 3660,8185 3716.05,8241.05 3716.05,9170 ; 3230,8385 3380,8385 3565,8385 ; 3230,8485 3380,8485 3565,8485 ; 3230,8585 3380,8585 3565,8585 ; 3230,8686 3380,8686 3564,8686 3565,8685 ; 3230.12,8285 3380,8285 3565,8285 ; 3245,7685 3565,7685 ; 3245,7785 3565,7785 ; 3374.76,7880 3380,7885.24 ; 3380,7985.24 3380.12,7985.12 3564.88,7985.12 3565,7985 3730,7985 3795,8050 3795,8710 3916.05,8831.05 3916.05,9170 ; 3565,7885 3834.07,7885 ; 4016.05,9170 4016.05,8836.05 3835,8655 3835,7947.49 3834.07,7946.56 3834.07,7885 ; 4165,6785 4505,6785 ; 4165,6885 4505,6885 ; 4165,6985 4505,6985 ; 4165,7085 4505,7085 ; 4165,7185 4505,7185 ; 4165,7285 4505,7285 ; 4165,7385 4505,7385 ; 4165,7485 4505,7485 ; 4165,7885 4350,7885 4505,7885 ; 4165,7985 4350,7985 4505,7985 ; 4165,8085 4350,8085 4505,8085 ; 4165,8185 4350,8185 4505,8185 ; 4165,8285 4345,8285 4505,8285 ; 4165,8385 4350,8385 4505,8385 ; 4165,8485 4350,8485 4505,8485 ; 4165,8585 4350,8585 4505,8585 ; 4855,6785 4855,6545 4940,6460 5069.06,6460 ; 4855,6885 5069.53,6670.47 5069.53,6620 ; 4855,6985 4925,6985 5070.83,6839.17 5070.83,6785 ; 4855,7085 4946.87,7085 5070.83,6961.04 5070.83,6945 ; 4855,7185 4940,7185 5015,7110 5070.83,7110 ; 4855,7285 4865,7275 5070.83,7275 ; 4855,7385 4925,7385 4977.8,7437.8 5070.83,7437.8 ; 4855,7485 4855.24,7485.24 4855.24,7569 4886.24,7600 5070.83,7600 ; 4855,7885 4855,7805 4892.42,7767.58 5069.06,7767.58 ; 4855,7985 4947.58,7985 5005,7927.58 5069.53,7927.58 ; 4855,8085 4945,8085 4952.58,8092.58 5069.53,8092.58 ; 4855,8185 4944.06,8185 5015,8255.94 5070.83,8255.94 ; 4855,8285 4943.89,8285 5069.06,8410.16 5069.06,8420 ; 4855,8385 4945,8385 5000,8440 5000,8561.33 5023.74,8585.08 5069.53,8585.08 ; 4855,8485 4855.24,8485.24 4910.24,8485.24 4950,8525 4950,8715 4985,8750 5069.53,8750 ; 4855,8585 4855,8865 4905,8915 5070.83,8915 ; 2075,6565 2145,6565 ; 2145,6565 3740,6565 3834.07,6659.07 3834.07,7885
  Bottom Layer w60: 1595,6925 1755,6925 ; 1595,7235 1750,7235 1755,7240 ; 1595,7545 1755,7545 ; 1880,6475 1875,6475 1595,6475 1450,6475 1285,6640 1285,7821.46 ; 1962.06,7240 1962.06,7130 1962.06,7020 1867.06,6925 1755,6925 ; 3233,7886 3395,7886 ; 4116.05,9170 4116.05,9288.95 4115,9290 ; 4325,7585 4325,7731.48 4272.05,7784.43 4165.57,7784.43 4165,7785 4164.43,7785.57 4085.71,7785.57 4034.07,7837.22 4034.07,8604.68 4113.81,8684.43 4164.43,8684.43 4165,8685 4325,8685 4417.94,8685 4495,8762.06 4495,9290 ; 5807.88,7977.88 5807.88,7827.88 5745,7765 5605,7765 5550,7820 5550,9100 5360,9290 4495,9290 ; 5809.8,8012.5 5809.8,8232.89 5807.88,8234.8 5807.88,8725.88 5950,8868 5950,9210 ; 6150,9210 6285,9210 6365,9130 6365,8235 6363.09,8233.09 6363.09,8038.09 ; 6365,8010 6810,8010 ; 6661.81,8761.96 6585.96,8761.96 6585,8761 6810,8761 6850.99,8760.99 6882.17,8792.17 v1(6882.17,8872.17) 6882.17,8912.83 6882.17,9012.83 6850,9045 6740,9045 ; 1285,7821.46 1641.07,7821.46 1755,7707.53 1755,7545 ; 1285,7821.46 1285,8145 1530,8390 1530,9165 1530,9222.91 1597.09,9290 4115,9290 ; 1755,6925 1755,7240 ; 1755,7240 1755,7545 ; 4115,9290 4495,9290
  other v1: 7255,3692.17 6985,8872.17

## Polygon pours and split planes (outlines as drawn)
no net on Bottom Layer (solid, pour order 12): 7070,9360 1170,9360 1170,6345 7100,6345 7105,6350 7070,6385
GND on Bottom Layer (solid, pour order 10): 7340,4180 1440,4180 1440,1165 7370,1165 7375,1170 7340,1205

## Other copper
Bottom Layer:
  text "L.A.G" at 6740,6690 h200
  text "L.A.G" at 7010,1510 h200

## Silkscreen, mask and mechanical layers (free items; w line width, h text height)
Top Overlay:
  lines w1.97: 1165,7821.46 2040,7821.46 2040,9290 1165,9290 1165,7821.46 ; 1435,2641.46 1435,4110 2310,4110 2310,2641.46 1435,2641.46
Drill Drawing:
  lines w1.97: 1040,6015 1040,9360 7600,9360 7600,6015 1040,6015 ; 1310,835 7870,835 7870,4180 1310,4180 1310,835

## Text inside footprints (layer, text, board x,y; h text height)
IC2: Top Overlay "------" at 6489,3503 h60 r180
IC2_1: Top Overlay "------" at 6219,8683 h60 r180